# Altium PCB differential driver.PcbDoc
Units mil, origin at the board's own origin, x right, y up, seen from the top; angles counter-clockwise.
Board outline 1347.25 x 1312 mil, 2 copper layers (Top Layer, Bottom Layer), stack 65.748 mil thick; 18 components, 20 nets, 72 pads, 21 vias.
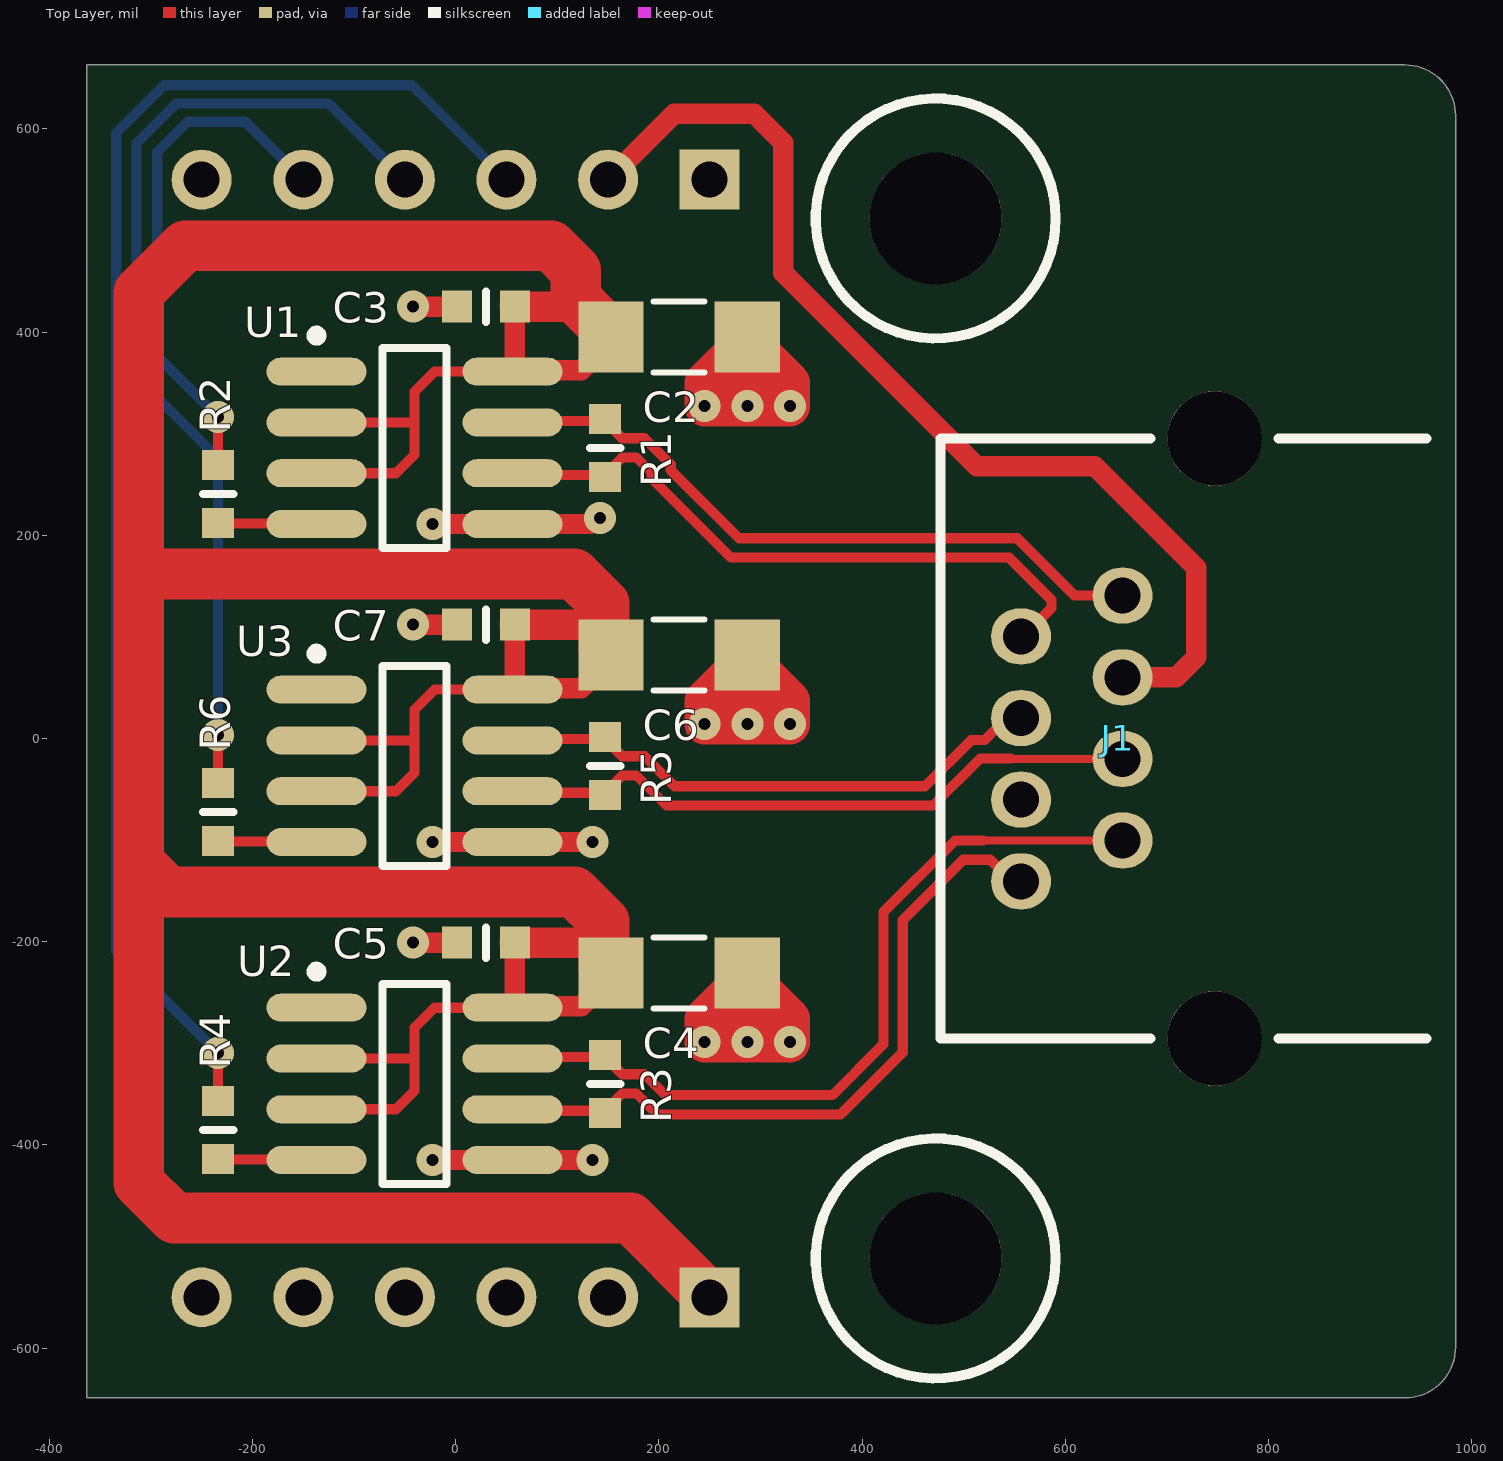
[diagram p0: Top Layer view]
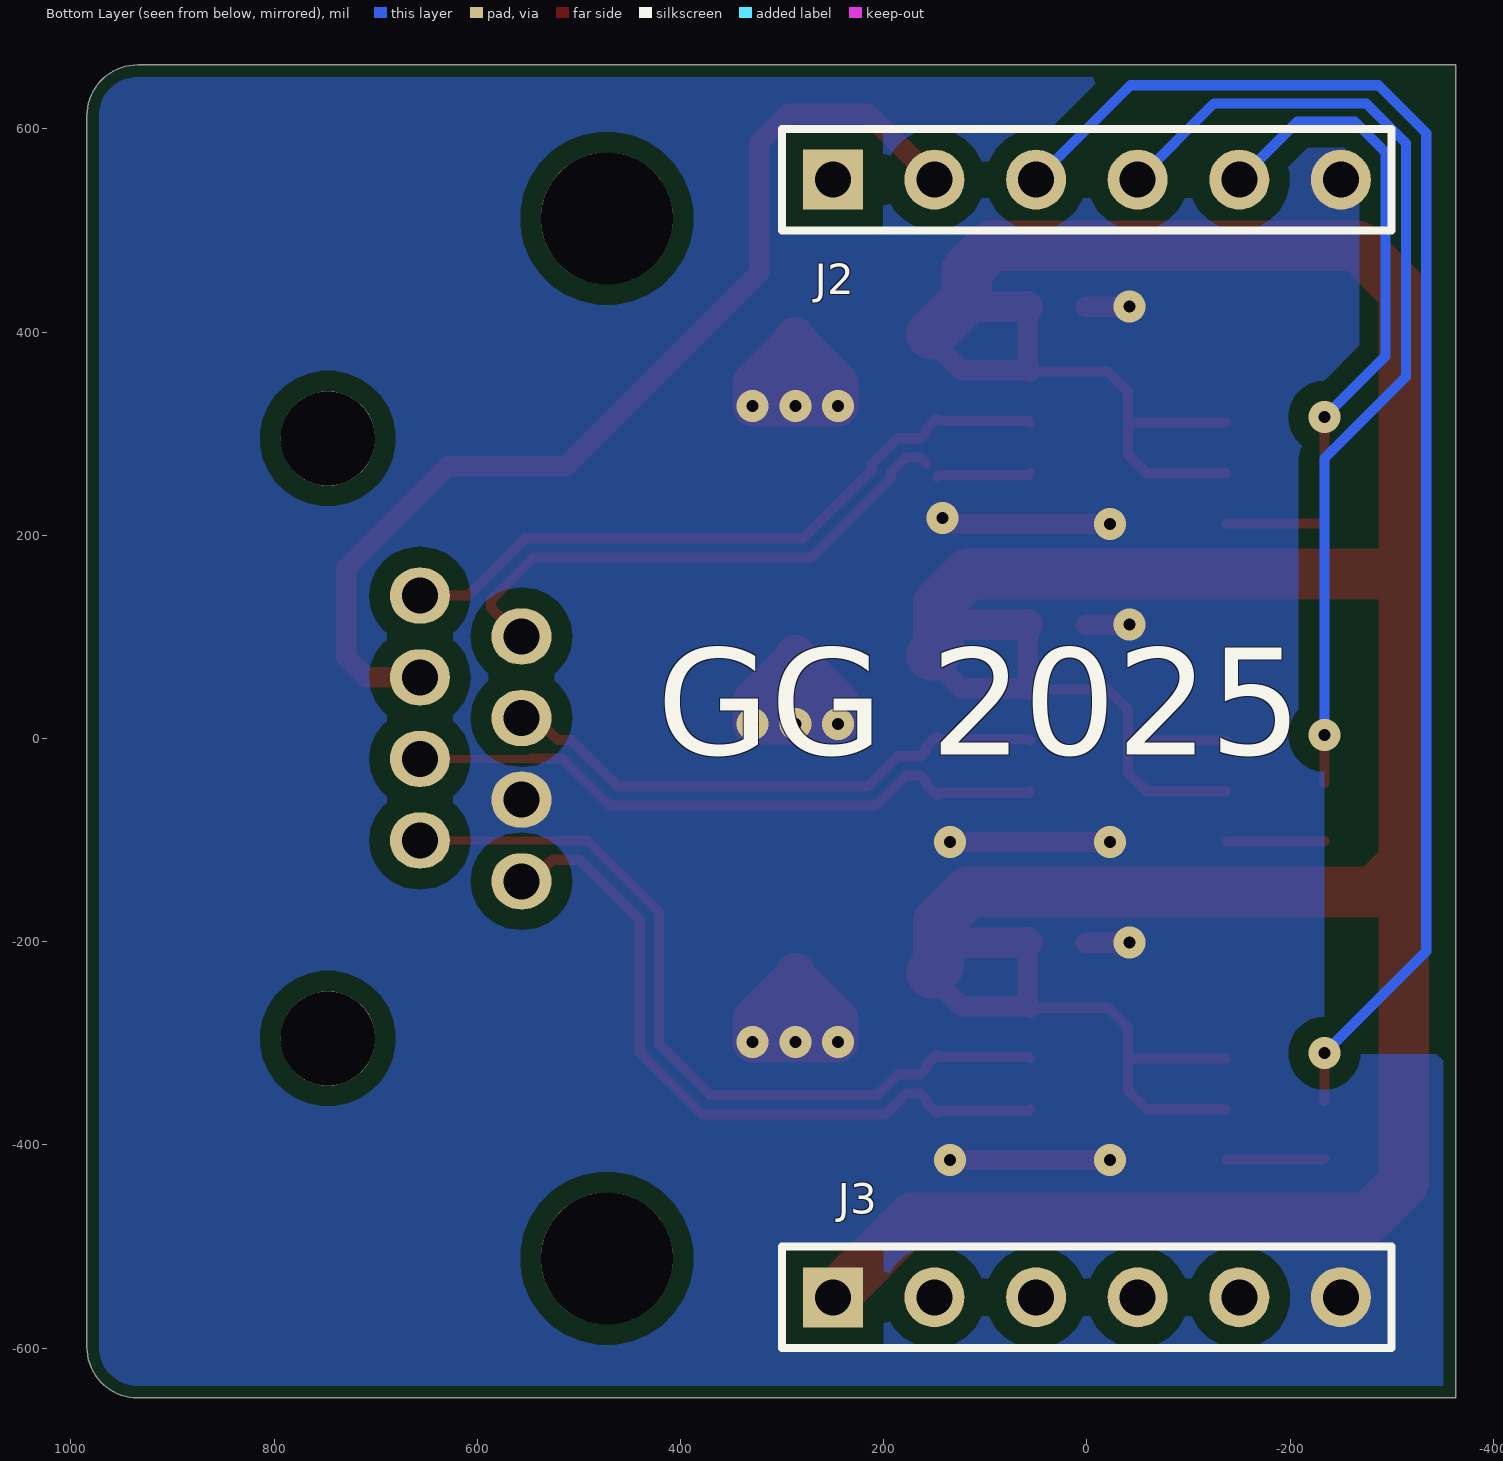
[diagram p1: Bottom Layer view, seen from below]
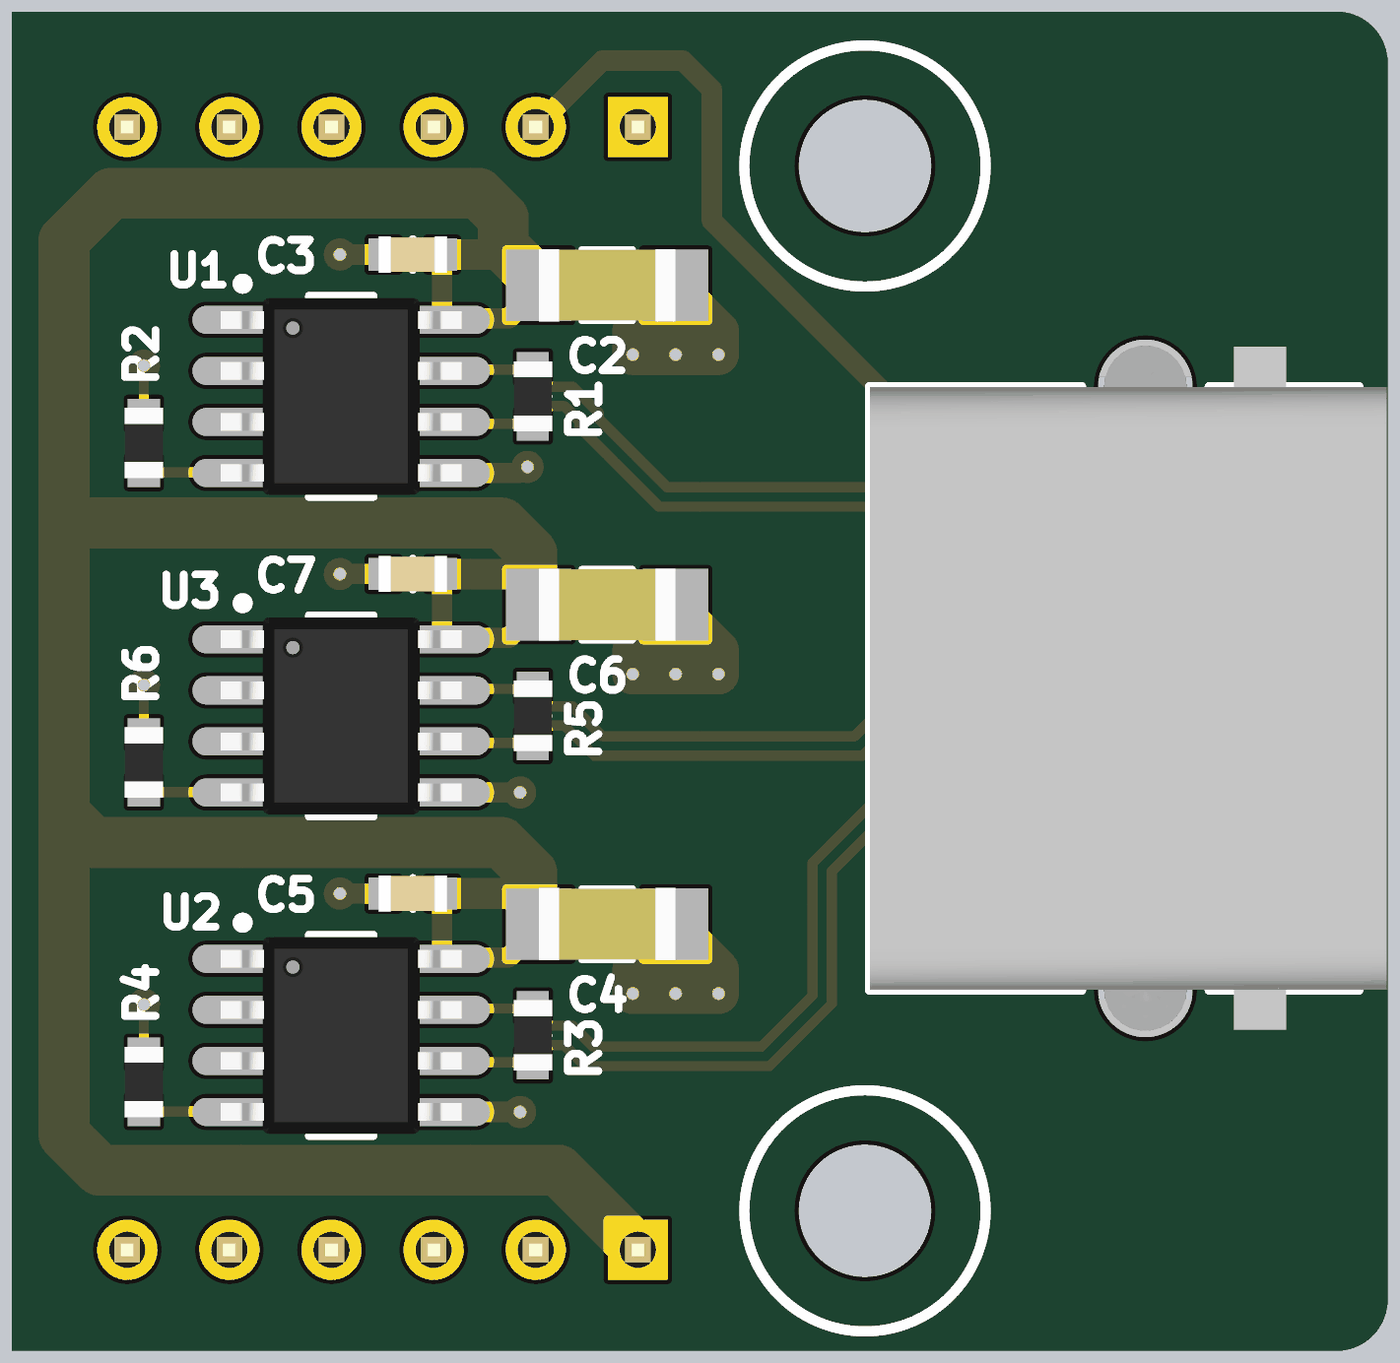
[diagram p2: 3D render of the assembled board from above, using the file's embedded part models]

## Layer stack, top to bottom
Top Solder: solder mask 0.4, Solder Resist, Dk 3.5
Top Layer: signal copper 1.378
Dielectric 1: dielectric 62.9921, FR-4, Dk 4.6
Bottom Layer: signal copper 1.378
Bottom Solder: solder mask 0.4, Solder Resist, Dk 3.5

## Board outline
-363,-649 934.25,-649 ccw(c934.25,-599) 984.25,-599 984.25,613 ccw(c934.25,613) 934.25,663 -363,663

## Design rules (kind name [scope] priority, off if disabled: settings)
BoardOutlineClearance [All] p1: gap=11.81 ignorepadtopadclearanceinfootprint=FALSE
Clearance Clearance_polygon [InPolygon] p1: gap=20 ignorepadtopadclearanceinfootprint=FALSE
Clearance [All] p2: gap=8 ignorepadtopadclearanceinfootprint=TRUE
ComponentClearance ComponentClearance_1 [InComponent('R6') vs InComponent('R8')] p1: gap=-39.37 collisioncheckmode=3 verticalgap=-39.37 showdistances=FALSE
ComponentClearance ComponentClearance_3 [HasFootprint('J_ARK3') vs HasFootprint('J_ARK3')] p2: gap=-39.37 collisioncheckmode=3 verticalgap=-39.37 showdistances=FALSE
ComponentClearance ComponentClearance_2 [HasFootprint('J_ARK2') vs HasFootprint('P_KLDX-0202-A')] p3: gap=-39.37 collisioncheckmode=3 verticalgap=-39.37 showdistances=FALSE
ComponentClearance [All] p4: gap=10 collisioncheckmode=3 verticalgap=10 showdistances=FALSE
DiffPairsRouting [InDifferentialPairClass('All Differential Pairs')] p1: maxlimit=9 minlimit=9 mostfreqgap=9 toplayer_minwidth=6 toplayer_maxwidth=10 toplayer_prefwidth=10 bottomlayer_minwidth=6 bottomlayer_maxwidth=10 bottomlayer_prefwidth=10 maxuncoupledlength=500
HoleSize [All] p1: absolutevalues=TRUE maxlimit=157.48 minlimit=11.81 maxpercent=80.000 minpercent=20.000
MinimumAnnularRing [All] p1: minimumring=7
MinimumSolderMaskSliver [All] p1: minsoldermaskwidth=5
PlaneConnect [All] p1: planeconnectstyle=Direct reliefexpansion=20 reliefentries=4 reliefconductorwidth=10 reliefairgap=10
PolygonConnect VIA [IsVia] p1: connectstyle=Direct reliefconductorwidth=10 reliefentries=4 polygonreliefangle="90 Angle" airgapwidth=10
PolygonConnect [All] p2: connectstyle=Direct reliefconductorwidth=30 reliefentries=4 polygonreliefangle="90 Angle" airgapwidth=15
RoomDefinition P3 [InComponentClass('P3')] p1: confinementstyle=ConfineIn formatcopy=TRUE lockcomponents=FALSE outline -266.22,-158 354,-158 354,145 -266.22,145
RoomDefinition P2 [InComponentClass('P2')] p2: confinementstyle=ConfineIn formatcopy=TRUE lockcomponents=FALSE outline -266.22,-471 354,-471 354,-168 -266.22,-168
RoomDefinition P1 [InComponentClass('P1')] p3: confinementstyle=ConfineIn formatcopy=TRUE lockcomponents=FALSE outline -266.22,155 354,155 354,458 -266.22,458
RoutingVias [All] p1: holewidth=11.81 width=31.5 viastyle="Through Hole" minholewidth=11.81 minwidth=31.5 maxholewidth=11.81 maxwidth=31.5
SilkToSilkClearance [All] p1: silktosilkclearance=1
SilkToSolderMaskClearance [IsPad] p1: minsilkscreentomaskgap=1 clearancetoexposedcopper=TRUE
SolderMaskExpansion [All] p1: expansion=4 istentingtop=FALSE
SupplyNets "Schematic Supply Nets_5" [InNet('VIN')] p1: voltage=0.000
SupplyNets "Schematic Supply Nets_2" [InNet('GND')] p2: voltage=0.000
SupplyNets "Schematic Supply Nets" [InNet('+5V')] p3: voltage=0.000
Width [All] p1: maxlimit=150 minlimit=7 preferedwidth=10 minimp=50.000000 maximp=50.000000 favimp=50.000000
23 further rules are at their usual default settings.

## Classes and differential pairs
net class D100: P1_N P1_P P2_N P2_P P3_N P3_P
channel class RS422_TX: P1 P2 P3
component class P3: C6 C7 R5 R6 U3
component class P2: C4 C5 R3 R4 U2
component class P1: C2 C3 R1 R2 U1
component class "differential driver": J1 J2 J3
differential pair P3: +P3_P -P3_N
differential pair P2: +P2_P -P2_N
differential pair P1: +P1_P -P1_N

## Components (designator, comment, footprint, x,y, rotation, side; value= is the part's Value field where it differs from the comment)
C2 "Ceramic X7R" C_1206_3216 220,395.02 r0 top value=10uF
C3 "Ceramic X7R" C_0603_1608 29.68,425.05 r180 top value=100nF
C4 "Ceramic X7R" C_1206_3216 220,-230.98 r0 top value=10uF (schematic designator C2)
C5 "Ceramic X7R" C_0603_1608 29.68,-200.95 r180 top value=100nF (schematic designator C3)
C6 "Ceramic X7R" C_1206_3216 220,82.02 r0 top value=10uF (schematic designator C2)
C7 "Ceramic X7R" C_0603_1608 29.68,112.05 r180 top value=100nF (schematic designator C3)
J1 "Modular Connector, Modular Jack, 1 x 1 (Port), 8P8C, Cat3" J_RJ45_MJ3225-88-0 701.72,0 r90 top value=MJ3225-88-0
J2 "Goldpin" P_HEADER_1x6_2.54 0,550 r180 bottom locked value=DS1021-1*6SF1-1 (schematic designator J11)
J3 "Goldpin" P_HEADER_1x6_2.54 0,-550 r180 bottom locked value=DS1021-1*6SF1-1 (schematic designator J10)
R1 "Resistor" R_0603_1608 147.22,286.05 r270 top value=120R
R2 "Resistor" R_0603_1608 -233.78,240.5 r270 top value=100R
R3 "Resistor" R_0603_1608 147.22,-339.95 r270 top value=120R (schematic designator R1)
R4 "Resistor" R_0603_1608 -233.78,-385.5 r270 top value=100R (schematic designator R2)
R5 "Resistor" R_0603_1608 147.22,-26.95 r270 top value=120R (schematic designator R1)
R6 "Resistor" R_0603_1608 -233.78,-72.5 r270 top value=100R (schematic designator R2)
U1 "Transceiver" SOP8_SO8_SOIC8_4X5X18 -40.54,286.05 r0 top value=SN65HVD1782D
U2 "Transceiver" SOP8_SO8_SOIC8_4X5X18 -40.54,-339.95 r0 top value=SN65HVD1782D (schematic designator U1)
U3 "Transceiver" SOP8_SO8_SOIC8_4X5X18 -40.54,-26.95 r0 top value=SN65HVD1782D (schematic designator U1)

## Footprints (in the part's own frame and the unit in brackets; to place one, negate y for a bottom-side part, rotate by r counter-clockwise, add the part's x,y. Pads: shape width x height; smd on the part's side, far side on the other; paste and mask are expansions set on the pad)
C_0603_1608 [mm]
  rect 0.75x0.8 smd: 1(-0.725,0) 2(0.725,0)
  silkscreen extent 0,-0.38 0,0.38, body extent -0.85,-0.45 0.85,0.45, height 0.89
C_1206_3216 [mil]
  rect 64x70 smd: 1(-67,0) 2(67,0)
  silkscreen extent -25,-35 25,35, body extent -67,-35 67,35, height 39
J_RJ45_MJ3225-88-0 [mm]
  oval 1.4x1.5 hole 0.9: 1(3.57,1.15) 2(2.55,3.69) 3(1.53,1.15) 4(0.51,3.69) 5(-0.51,1.15) 6(-1.53,3.69) 7(-2.55,1.15) 8(-3.57,3.69)
  round 2.36 hole 2.36 unplated: DNC(-7.5,-1.15) DNC(7.5,-1.15)
  silkscreen extent -7.5,-6.45 7.5,5.7, body extent -8.75,-7.15 8.75,5.7, height 14.5
P_HEADER_1x6_2.54 [mm] "Connector; Header; 6 Position, Male"
  rect 1.5x1.5 hole 0.9: 1(-6.35,0)
  round 1.5 hole 0.9: 2(-3.81,0) 3(-1.27,0) 4(1.27,0) 5(3.81,0) 6(6.35,0)
  silkscreen extent -7.62,-1.27 7.62,1.27, body extent -7.52,-1.25 7.72,1.25, height 8.2
R_0603_1608 [mm]
  rect 0.75x0.8 smd: 1(-0.725,0) 2(0.725,0)
  silkscreen extent 0,-0.38 0,0.38, body extent -0.87,-0.47 0.88,0.48, height 0.54
SOP8_SO8_SOIC8_4X5X18 [mm]
  oval 2.5x0.7 smd: 1(-2.45,1.905) 2(-2.45,0.635) 3(-2.45,-0.635) 4(-2.45,-1.905) 5(2.45,-1.905) 6(2.45,-0.635) 7(2.45,0.635) 8(2.45,1.905)
  silkscreen extent -2.57,-2.5 0.8,2.93, body extent -3,-2.45 3,2.45, height 1.7

## Part data
C2 C4 C6: library part C_10uF_25V_X7R_1206_10, "Capacitor", Dielectric=X7R, Manufacturer=Samsung, Manufacturer Part Number=CL31B106KAHNNNE, Tolerance (%)=10, Voltage=25V, HelpURL=http://www.tme.eu/pl/Document/4a42202b32dab16128fe107dd69598cc/samsung-chip-cap.pdf, Part Number=C_10uF_25V_X7R_1206_10, SCH_Footprint=1206, Supplier 1=TME, Supplier 2="RS Components", Supplier 3=Farnell, Supplier 4=Mouser, Supplier 5=Digi-Key, Supplier 6=LCSC, Supplier Part Number 1=CL31B106KAHNNNE, Supplier Part Number 2=766-6773, Supplier Part Number 3=3013526, Supplier Part Number 4=187-CL31B106KAHNNNE, Supplier Part Number 5=1276-1804-1-ND
C3 C5 C7: library part C_100nF_50V_X7R_0603_5, "Capacitor", Dielectric=X7R, Manufacturer=Samsung, Manufacturer Part Number=CL10B104JB8NNNC, Tolerance (%)=5, Voltage=50V, HelpURL=http://www.tme.eu/pl/Document/4a42202b32dab16128fe107dd69598cc/samsung-chip-cap.pdf, Part Number=C_100nF_50V_X7R_0603_5, SCH_Footprint=0603, Supplier 1=TME, Supplier 2="RS Components", Supplier 3=Farnell, Supplier 4=Mouser, Supplier 5=Digi-Key, Supplier 6=LCSC, Supplier Part Number 1=CL10B104JB8NNNC, Supplier Part Number 2=7665455, Supplier Part Number 5=1276-1033-1-ND, Supplier Part Number 6=C24452
J1: library part J_RJ45_MJ3225-88-0, Manufacturer="Global Connector Technology", Manufacturer Part Number=MJ3225-88-0, HelpURL=https://www.farnell.com/cad/3781788.pdf, Part Number=J_RJ45_MJ3225-88-0, SCH_Footprint=J_RJ45, Supplier 1=TME, Supplier 2="RS Components", Supplier 3=Farnell, Supplier 4=Mouser, Supplier 5=Digi-Key, Supplier 6=LCSC, Supplier 7=Newark, Supplier Part Number 3=4071641, Supplier Part Number 7=61AK4308
J2 J3: library part P_HEADER_1x6_2.54, "Pin Header", Manufacturer=Connfly, Manufacturer Part Number=DS1021-1*6SF1-1, Supplier Part Number 1=ZL201-06G, HelpURL=http://www.tme.eu/en/Document/cc301e58a5da78cb543a94b5a5b7f06a/DS1021.pdf, Part Number=P_HEADER_1x6_2.54, SCH_Footprint="1x6 2.54mm", Supplier 1=TME, Supplier 2="RS Components", Supplier 3=Farnell, Supplier 4=Mouser, Supplier 5=Digi-Key, Supplier 6=LCSC
R1 R3 R5: library part R_120R_0603_1_AECQ0, Manufacturer=Panasonic, Manufacturer Part Number=ERJ-3EKF1200V, Power=100mW, Supplier Part Number 1=ERJ3EKF1200V, Tolerance=1%, Voltage=75V, HelpURL=https://industrial.panasonic.com/cdbs/www-data/pdf/RDA0000/AOA0000C304.pdf, Part Number=R_120R_0603_1_AECQ0, SCH_Footprint=0603, Supplier 1=TME, Supplier 2="RS Components", Supplier 3=Farnell, Supplier 4=Mouser, Supplier 5=Digi-Key, Supplier 6=LCSC, Supplier Part Number 3=2303067, Supplier Part Number 4=667-ERJ-3EKF1200V, Supplier Part Number 5=P120HCT-ND, Supplier Part Number 6=C169257
R2 R4 R6: library part R_100R_0603_1, Manufacturer=Yageo, Manufacturer Part Number=RC0603FR-07100RL, Power=100mW, Supplier Part Number 1=RC0603FR-07100R, Tolerance=1%, Voltage=50V, HelpURL=http://www.tme.eu/en/Document/d2a72e545e5c8eb7bf2a04fa97535928/rc0603yageo.pdf, Part Number=R_100R_0603_1, SCH_Footprint=0603, Supplier 1=TME, Supplier 2="RS Components", Supplier 3=Farnell, Supplier 4=Mouser, Supplier 5=Digi-Key, Supplier 6=LCSC, Supplier Part Number 3=2131804, Supplier Part Number 4=603-RC0603FR-07100RL, Supplier Part Number 5=311-100HRCT-ND
U1 U2 U3: library part U_SN65HVD1782DR, "Fault-Protected  RS-485  Transceivers  With 3.3-V to 5-V Operation", Manufacturer="Texas Instruments", Manufacturer Part Number=SN65HVD1782D, HelpURL=http://www.ti.com/lit/ds/slls877h/slls877h.pdf, Part Number=U_SN65HVD1782DR, SCH_Footprint=SO-8, Supplier 1=TME, Supplier 2="RS Components", Supplier 3=Farnell, Supplier 4=Mouser, Supplier 5=Digi-Key, Supplier 6=LCSC, Supplier Part Number 2=7093179P, Supplier Part Number 3=1755056, Supplier Part Number 4=595-SN65HVD1782D, Supplier Part Number 5=296-33574-5-ND

## Free pads (board coordinates)
  round 129.92 hole 129.92 unplated: ""(472.44,-511.81) ""(472.44,511.81)

## Via types
v1: diameter 31.5, hole 11.81, Top Layer to Bottom Layer, tented both sides, 21 vias

## Nets (pads, with @x,y where several pads share a name; then routed paths per layer and width w, separated by ;. In a path a pad name is that pad's centre, name@x,y a point inside that pad or via, vN(x,y) a via of type N, cw(c..) or ccw(c..) an arc to the next point about the centre after c; other vN are vias at no path point)
+5V: C2.1 C3.1 C4.1 C5.1 C6.1 C7.1 J3.1 U1.2 U1.3 U1.8 U2.2 U2.3 U2.8 U3.2 U3.3 U3.8 | length 4956.1
  Top Layer w10: U2.3@-137,-364.98 -58.8,-364.98 -40.54,-346.72 -40.54,-315.72 ; U2.2@-137,-314.98 -41.28,-314.98 -40.54,-315.72 ; U3.3@-137,-51.98 -58.8,-51.98 -40.54,-33.72 -40.54,-2.72 ; U3.2@-137,-1.98 -41.28,-1.98 -40.54,-2.72 ; U1.3@-137,261.02 -58.8,261.02 -40.54,279.28 -40.54,310.28 ; U1.2@-137,311.02 -41.28,311.02 -40.54,310.28 ; U2.8@55.91,-264.98 -20.8,-264.98 -40.54,-284.72 -40.54,-315.72 ; U3.8@55.91,48.02 -20.8,48.02 -40.54,28.28 -40.54,-2.72 ; U1.8@55.91,361.02 -20.8,361.02 -40.54,341.28 -40.54,310.28
  Top Layer w20: U2.8 U2.8@57.36,-263.51 ; U3.8 U3.8@57.36,49.49 ; U1.8 U1.8@57.36,362.49 ; C5.1 58.22,-262.65 U2.8@57.36,-263.51 ; C7.1 58.22,50.35 U3.8@57.36,49.49 ; C3.1 58.22,363.35 U1.8@57.36,362.49 ; C4.1 153,-233.98 123.47,-263.51 U2.8@57.36,-263.51 ; C6.1 153,79.02 123.47,49.49 U3.8@57.36,49.49 ; C2.1 153,392.02 123.47,362.49 U1.8@57.36,362.49
  Top Layer w30: C5.1@57.98,-200.72 C5.1 125.98,-200.95 C4.1@153,-227.98 ; C7.1@57.98,112.28 C7.1 C6.1@125.98,112.05 ; C3.1@57.98,425.28 C3.1 C2.1@125.98,425.05 ; C2.1 C2.1@153,398.02
  Top Layer w50: C4.1 146,-223.98 146,-180.29 116.71,-151 -282.71,-151 -312,-121.71 ; C6.1 146,89.02 146,132.71 116.71,162 -312,162 ; C2.1@153,398.02 125.98,425.05 118.22,432.8 118.22,460.78 94,485 -266,485 -312,439 -312,162 ; J3.1 172,-472 -277,-472 -312,-437 -312,-121.71 ; -312,-121.71 -312,162
EXT0: J3.2
EXT1: J2.3 R4.1 | length 1436.5
  Top Layer w10: R4.1 v1(-233.78,-309.78)
  Bottom Layer w10: v1(-233.78,-309.78) -334,-209.56 -334,596 -287,643 -43,643 J2.3
EXT2: J3.3
EXT3: J2.4 R6.1 | length 974.4
  Top Layer w10: R6.1 v1(-233.78,3.22)
  Bottom Layer w10: v1(-233.78,3.22) -233.78,275.56 -314,355.79 -314,586 -275,625 -125,625 J2.4
EXT4: J3.4
EXT5: J2.5 R2.1 | length 512.8
  Top Layer w10: R2.1 v1(-233.78,316.22)
  Bottom Layer w10: v1(-233.78,316.22) -293.78,376.22 -293.78,577.22 -264,607 -207,607 J2.5
EXT6: J3.5
GND: C2.2 C3.2 C4.2 C5.2 C6.2 C7.2 J1.6 J2.6 J3.6 U1.5 U2.5 U3.5 | length 1561.3
  Top Layer w20: v1(-41.78,-200.95) C5.2 ; v1(-41.78,112.05) C7.2 ; v1(-41.78,425.05) C3.2 ; v1(-22.8,-414.98) v1(134.63,-414.98) ; v1(-22.8,-101.98) v1(134.63,-101.98) ; v1(-22.8,211.02) 132.91,211.02 138.89,217 v1(142,217)
  Top Layer w40: C4.2 C4.2@287,-233.98 ; C6.2 C6.2@287,79.02 ; C2.2 C2.2@287,392.02 ; v1(287,-298.98) C4.2@287,-233.98 ; v1(287,-298.98) v1(245,-298.98) 245,-275.98 C4.2@287,-233.98 ; v1(287,-298.98) v1(329,-298.98) 329,-275.98 C4.2@287,-233.98 ; v1(287,14.02) C6.2@287,79.02 ; v1(287,14.02) v1(329,14.02) 329,37.02 C6.2@287,79.02 ; v1(287,14.02) v1(245,14.02) 245,37.02 C6.2@287,79.02 ; v1(287,327.02) C2.2@287,392.02 ; v1(287,327.02) v1(329,327.02) 329,350.02 C2.2@287,392.02 ; v1(287,327.02) v1(245,327.02) 245,350.02 C2.2@287,392.02
LED_EN: J1.3 J2.2 | length 1034.8
  Top Layer w20: J2.2 215,615 294,615 322.5,586.5 322.5,458.5 513,268 629,268 729,168 729,80 709.24,60.24 J1.3
NetR2_2: R2.2 U1.4 | length 97.2
  Top Layer w10: R2.2 -233.32,211.5 -137.46,211.5 U1.4
NetR4_2: R4.2 U2.4 | length 97.2
  Top Layer w10: R4.2 -233.32,-414.5 -137.46,-414.5 U2.4
NetR6_2: R6.2 U3.4 | length 97.2
  Top Layer w10: R6.2 -233.32,-101.5 -137.46,-101.5 U3.4
P1_N: J1.1 R1.1 U1.7 | length 679.3
  Top Layer w10: U1.7 57.36,312.49 145.12,312.49 R1.1 148.2,314.59 157.97,304.83 157.97,301.41 163.83,295.55 185.84,295.55 211.77,269.62 211.77,264.1 278.87,197 552.74,197 609.19,140.55 J1.1
P1_P: J1.2 R1.2 U1.6 | length 634.4
  Top Layer w10: U1.6 57.68,259.28 145.45,259.28 R1.2 ; R1.2@157.97,270.69 163.83,276.55 177.97,276.55 192.77,261.75 192.77,256.23 271,178 544.87,178 586.3,136.56 586.3,128.28 558.42,100.39 J1.2
P2_N: J1.7 R3.1 U2.7 | length 800.4
  Top Layer w8: 518.74,-100.39 J1.7
  Top Layer w10: U2.7 57.36,-313.51 145.12,-313.51 R3.1 148.2,-311.41 157.97,-321.17 157.97,-324.59 163.83,-330.45 185.84,-330.45 206.39,-351 371,-351 421,-301 421,-171 491.61,-100.39 518.74,-100.39
P2_P: J1.8 R3.2 U2.6 | length 709.1
  Top Layer w10: U2.6 57.36,-366.4 145.12,-366.4 R3.2 148.2,-368.5 157.97,-358.73 157.97,-355.31 163.83,-349.45 177.97,-349.45 198.52,-370 378.87,-370 440,-308.87 440,-178.87 499.48,-119.39 526.06,-119.39 547.22,-140.55 J1.8
P3_N: J1.4 R5.1 U3.7 | length 551.9
  Top Layer w10: U3.7 57.36,-0.51 145.12,-0.51 R5.1 148.2,1.59 157.97,-8.17 157.97,-11.59 163.83,-17.45 185.84,-17.45 215.39,-47 462,-47 507.32,-1.68 520.52,-1.68 542.27,20.08 J1.4
P3_P: J1.5 R5.2 U3.6 | length 643.5
  Top Layer w8: 546.45,-19.68 546.85,-20.08 J1.5
  Top Layer w10: U3.6 57.36,-53.4 145.12,-53.4 R5.2 148.2,-55.5 157.97,-45.73 157.97,-42.31 163.83,-36.45 177.97,-36.45 207.52,-66 469.87,-66 516.19,-19.68 546.45,-19.68
VIN: J2.1
pads on no net: J1.DNC U1.1 U2.1 U3.1

## Polygon pours and split planes (outlines as drawn)
GND on Bottom Layer "GND_L02_P000" (solid, remove dead copper, pour order 0): -363,-649 984.25,-649 984.25,663 -363,663

## Other copper
Multi-Layer:
  pour cut-out: -233.78,3.22 -233.78,-311 -349,-311 -349,6

## Silkscreen, mask and mechanical layers (free items; w line width, h text height)
Top Overlay:
  circle w10: c472.44,511.81 r118.11
  circle w10: c472.44,-511.81 r118.11
Bottom Overlay:
  text "GG 2025" at 423.4,-50.69 h180
Mechanical 1:
  the board outline again, w10
Mechanical 13:
  lines w5: 477.31,-354.33 376.72,-354.33 376.72,355 477.31,355